# Altium PCB parsa_sanoni.PcbDoc
Units mm, origin at the board's own origin, x right, y up, seen from the top; angles counter-clockwise.
Board outline 102.11 x 63.25 mm, 2 copper layers (Top Layer, Bottom Layer); 29 components, 23 nets, 114 pads, 15 vias.
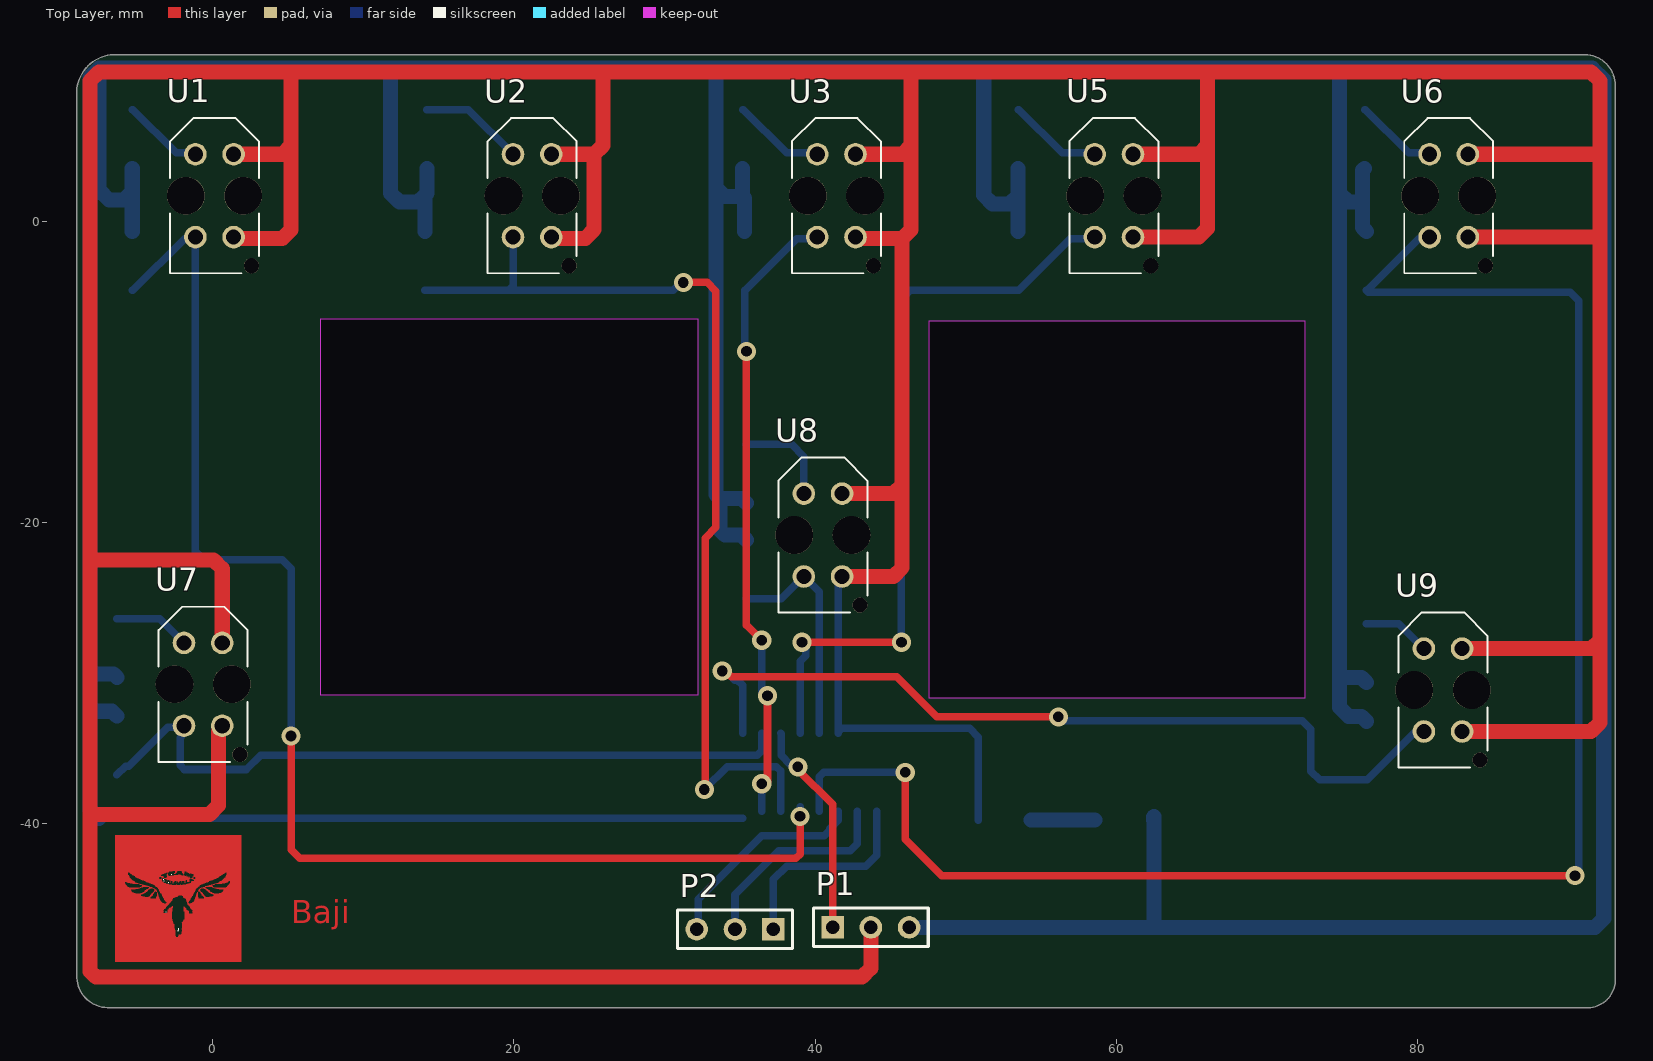
[diagram p0: Top Layer view]
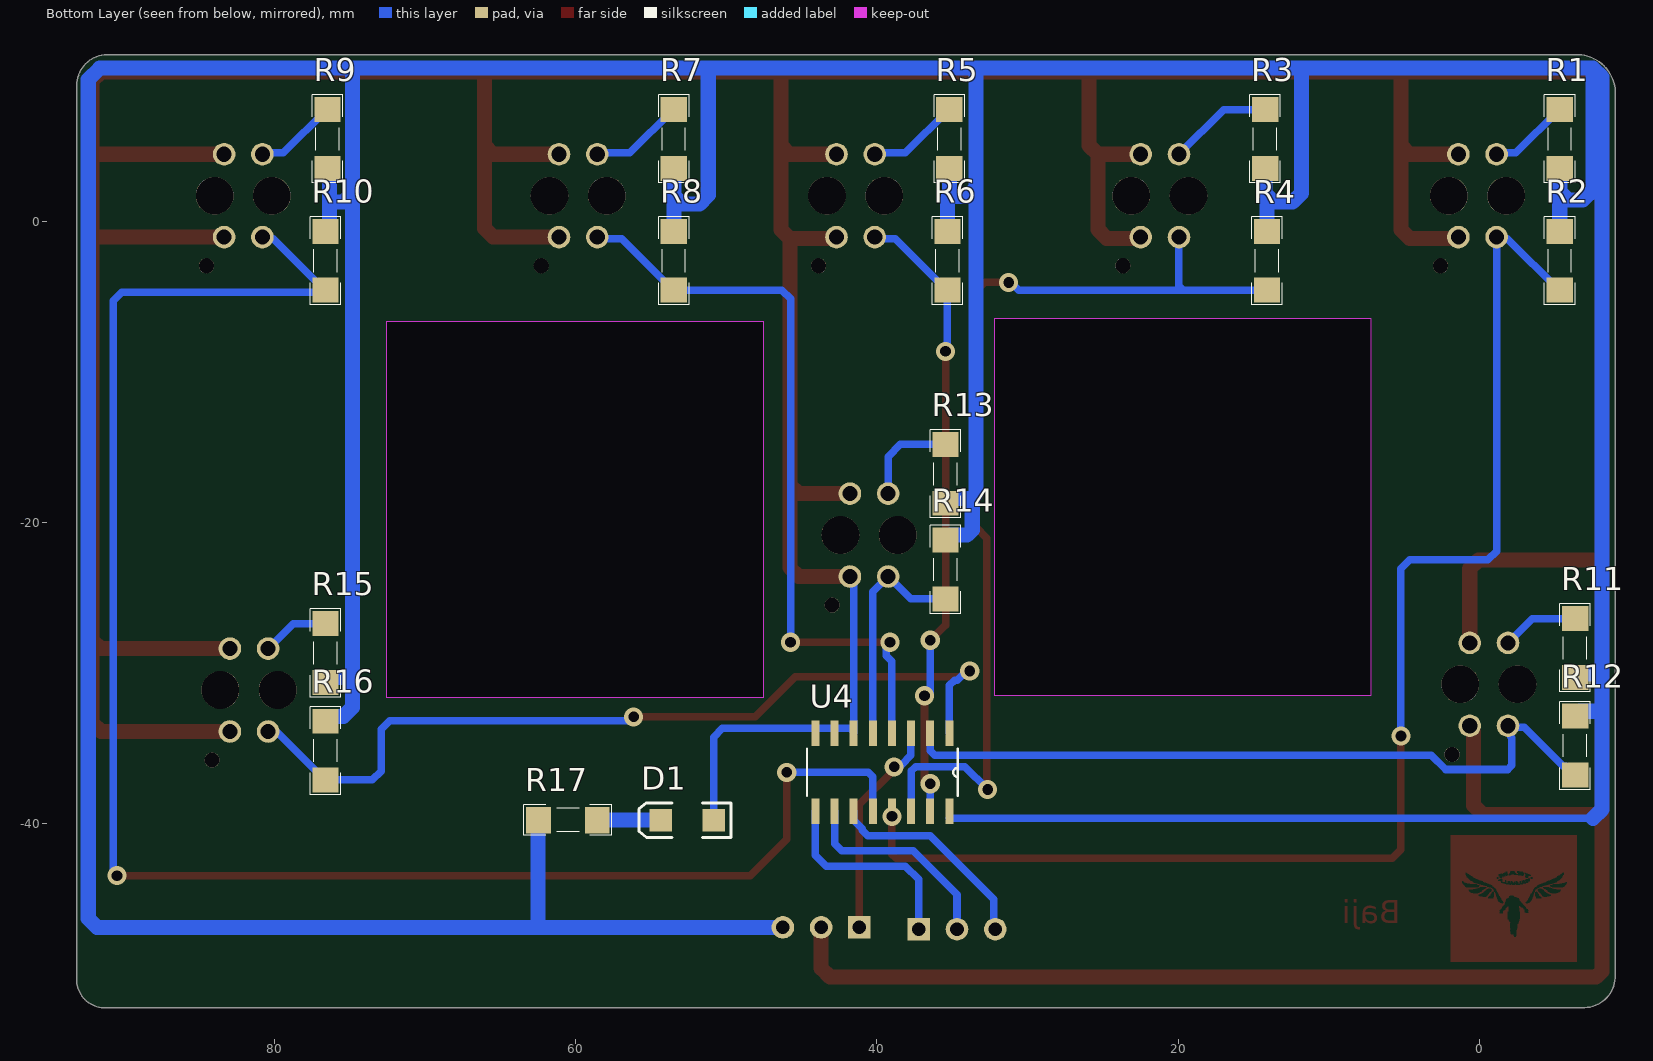
[diagram p1: Bottom Layer view, seen from below]
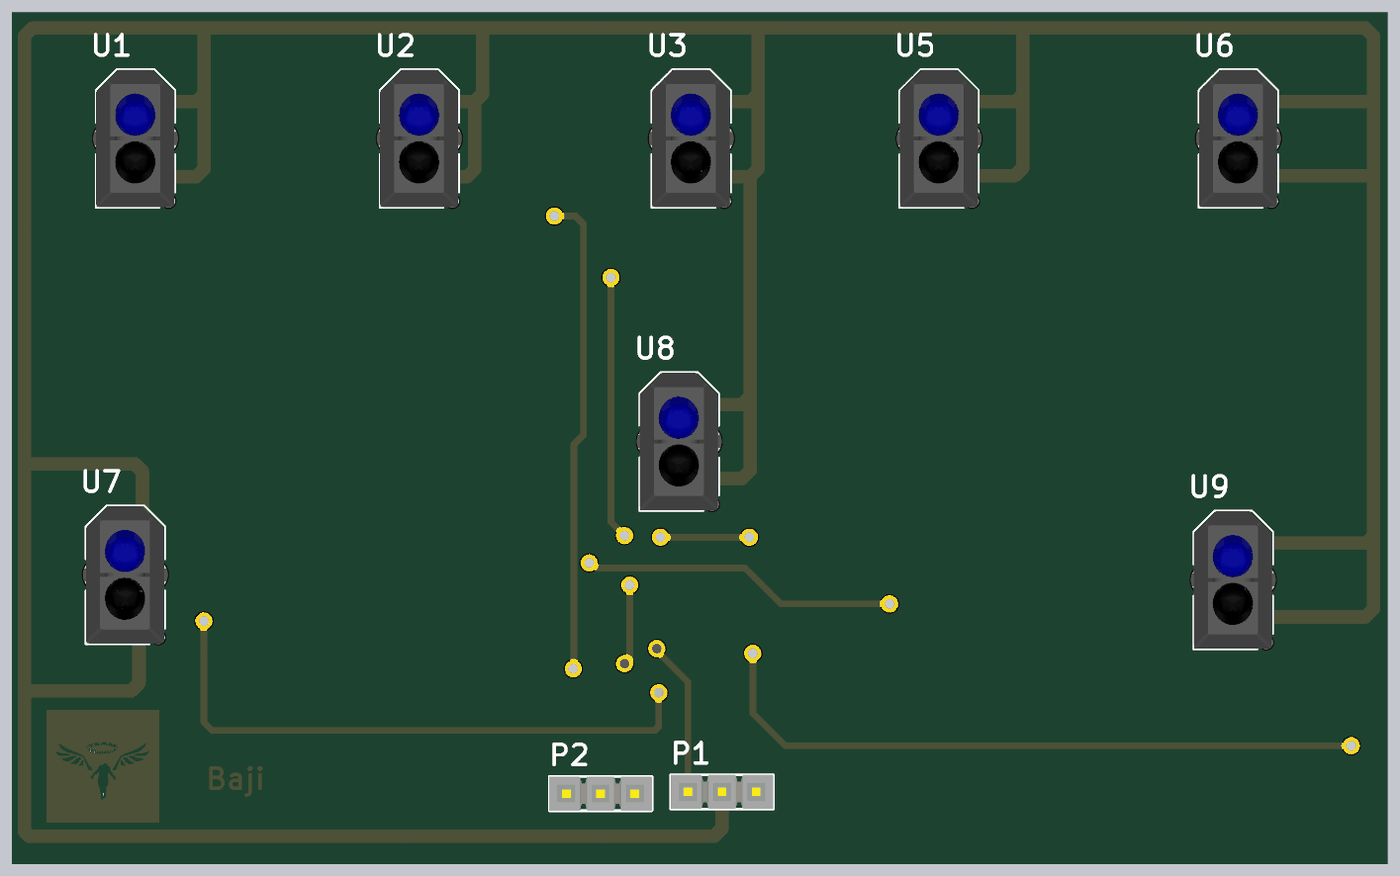
[diagram p2: 3D render of the assembled board from above, using the file's embedded part models]
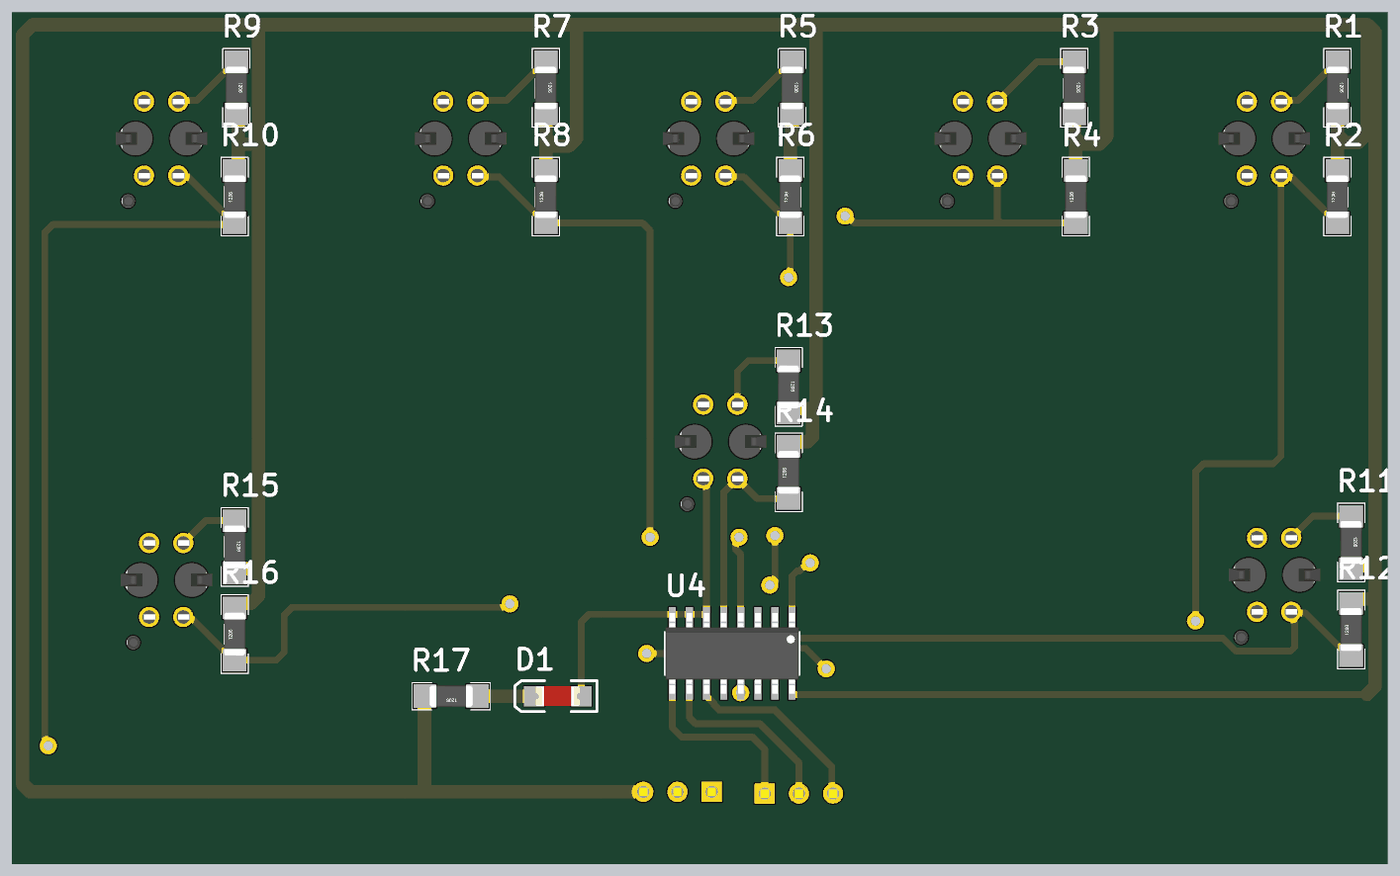
[diagram p3: 3D render of the assembled board from below, using the file's embedded part models]

## Layer stack, top to bottom
Top Solder: solder mask 0.0102, Solder Resist, Dk 3.5
Top Layer: signal copper 0.0356
Dielectric 1: dielectric 0.32, FR-4, Dk 4.8
Bottom Layer: signal copper 0.0356
Bottom Solder: solder mask 0.0102, Solder Resist, Dk 3.5

## Board outline
-6.989,-52.197 cw(c-6.921,-50.102) -9.017,-50.036 -9.017,8.379 cw(c-6.477,8.509) -6.347,11.049 90.928,11.049 cw(c91.059,9.017) 93.096,9.017 cw(c91.059,9.017) 93.091,8.886 93.091,-50.419 93.091,-50.424 cw(c91.249,-50.355) 91.318,-52.197 cw(c91.249,-50.355) 91.184,-52.197
cut-out: 32.185,-31.477 7.185,-31.477 7.185,-6.477 32.185,-6.477
cut-out: 47.517,-31.623 72.517,-31.623 72.517,-6.623 47.517,-6.623

## Design rules (kind name [scope] priority, off if disabled: settings)
Clearance [All] p1: gap=0.254 ignorepadtopadclearanceinfootprint=FALSE except(0: Arc-Hole Track-Hole SMDPad-Hole THPad-Hole Via-Hole Fill-Hole Poly-Hole Region-Hole Text-Hole)
PolygonConnect [All] p1: connectstyle=Relief reliefconductorwidth=0.254 reliefentries=4 polygonreliefangle="90 Angle" airgapwidth=0.254
RoutingVias [All] p1: holewidth=0.711 width=1.27 viastyle="Through Hole" minholewidth=0.711 minwidth=1.27 maxholewidth=0.711 maxwidth=1.27
SolderMaskExpansion [All] p1: expansion=0.102 istentingtop=FALSE
Width [All] p1: maxlimit=2 minlimit=0.5 preferedwidth=1 minimp=50.000000 maximp=50.000000 favimp=50.000000
30 further rules are at their usual default settings.

## Components (designator, comment, footprint, x,y, rotation, side; value= is the part's Value field where it differs from the comment)
D1 "SMD 1206 LED" "LED 1206" 52.578,-39.751 r0 bottom
P1 "Header 3" HDR1X3 41.148,-46.863 r0 top
P2 "Header 3" HDR1X3 37.211,-46.99 r180 top
R1 "1K" RESC4817X04N -5.334,5.461 r270 bottom
R2 "1K" RESC4817X04N -5.334,-2.622 r90 bottom
R3 "1K" RESC4817X04N 14.224,5.461 r270 bottom
R4 "1K" RESC4817X04N 14.097,-2.622 r90 bottom
R5 "1K" RESC4817X04N 35.179,5.461 r270 bottom
R6 "1K" RESC4817X04N 35.306,-2.622 r90 bottom
R7 "1K" RESC4817X04N 53.467,5.461 r270 bottom
R8 "1K" RESC4817X04N 53.467,-2.622 r90 bottom
R9 "1K" RESC4817X04N 76.454,5.461 r270 bottom
R10 "1K" RESC4817X04N 76.581,-2.622 r90 bottom
R11 "1K" RESC4817X04N -6.35,-28.321 r270 bottom
R12 "1K" RESC4817X04N -6.35,-34.798 r90 bottom
R13 "1K" RESC4817X04N 35.433,-16.764 r270 bottom
R14 "1K" RESC4817X04N 35.433,-23.114 r90 bottom
R15 "1K" RESC4817X04N 76.581,-28.657 r270 bottom
R16 "1K" RESC4817X04N 76.581,-35.134 r90 bottom
R17 "1K" RESC4817X04N 60.497,-39.751 r0 bottom
U1 "TCRT5000" OPTO_TCRT5000 0.127,1.695 r90 top
U2 "TCRT5000" OPTO_TCRT5000 21.209,1.695 r90 top
U3 "TCRT5000" OPTO_TCRT5000 41.402,1.695 r90 top
U4 "74HC4051D" SOIC127P600X175-16N 39.624,-36.576 r270 bottom
U5 "TCRT5000" OPTO_TCRT5000 59.817,1.695 r90 top
U6 "TCRT5000" OPTO_TCRT5000 82.042,1.695 r90 top
U7 "TCRT5000" OPTO_TCRT5000 -0.63,-30.734 r90 top
U8 "TCRT5000" OPTO_TCRT5000 40.508,-20.828 r90 top
U9 "TCRT5000" OPTO_TCRT5000 81.661,-31.115 r90 top

## Footprints (in the part's own frame and the unit in brackets; to place one, negate y for a bottom-side part, rotate by r counter-clockwise, add the part's x,y. Pads: shape width x height; smd on the part's side, far side on the other; paste and mask are expansions set on the pad)
HDR1X3 [mm] "Connector; Header; 3 Position"
  rect 1.5x1.5 hole 0.9: 1(0,0)
  round 1.5 hole 0.9: 2(2.54,0) 3(5.08,0)
  silkscreen extent -1.27,-1.27 6.35,1.27, body extent -1.26,-1.27 6.36,1.27, height 8.38
"LED 1206" [mm]
  rect 1.5x1.5 smd: 1(-1.75,0) 2(1.75,0)
  silkscreen extent -2.9,-1.15 3.2,1.15, body extent -1.65,-0.72 1.65,0.73, height 1.36
OPTO_TCRT5000 [mm]
  round 1.5 hole 1: A(2.75,1.27) CATH(2.75,-1.27) COLL(-2.75,1.27) E(-2.75,-1.27)
  round 1 hole 1 unplated: ""(-4.65,-2.45)
  round 2.5 hole 2.5 unplated: ""(0,1.9) ""(0,-1.9)
  silkscreen extent -5.15,-2.95 5.15,2.95, body extent -5.1,-3.37 5.1,3.43, height 7.2
RESC4817X04N [mm] "Chip Resistor, 2-Leads, Body 4/80x1/70mm, IPC Medium Density-Design:Abbas Basereh"
  rect 1.65x1.75 smd: 1(-1.95,0) 2(1.95,0)
  silkscreen extent -2.92,-1.02 2.92,1.02, body extent -1.6,-0.8 1.6,0.8, height 1
SOIC127P600X175-16N [mil]
  rect 67x21 smd: 1(-102,175) 2(-102,125) 3(-102,75) 4(-102,25) 5(-102,-25) 6(-102,-75) 7(-102,-125) 8(-102,-175) 9(102,-175) 10(102,-125) 11(102,-75) 12(102,-25) 13(102,25) 14(102,75) 15(102,125) 16(102,175)
  silkscreen extent -62,-197 62,197, body extent -118,-195 118,195, height 69

## Part data
D1: library part "LED SMD 1206"
P1 P2: "Header, 3-Pin", LatestRevisionDate=17-Jul-2002, LatestRevisionNote="Re-released for DXP Platform.", Publisher="Altium Limited"
R1 R2 R3 R4 R5 R6 R7 R8 R9 R10 R11 R12 R13 R14 R15 R16 R17: library part "RES 1206 0.25W", "RES 1206", Data=16-12-2016, Desc.="RES SMD 1206", Designer="Abbas Basereh"
U1 U2 U3 U5 U6 U7 U8 U9: "950 nm 60 mA Through Hole Reflective Optical Sensor with Transistor Output", Package=None, Availability=Unavailable, MP=TCRT5000, Price=None
U4: "1 Circuit IC Switch 8:1 130Ohm 16-SOIC", Package="SOIC-16 Toshiba", Availability="In Stock", Check_prices=https://www.snapeda.com/parts/74HC4051D/Toshiba/view-part/?ref=eda, MF=Toshiba, MP=74HC4051D, Price=None, Purchase-URL=https://pricing.snapeda.com/search/part/74HC4051D/?ref=eda, SnapEDA_Link=https://www.snapeda.com/parts/74HC4051D/Toshiba/view-part/?ref=snap

## Via types
v1: diameter 1.27, hole 0.711, Top Layer to Bottom Layer, 15 vias

## Nets (pads, with @x,y where several pads share a name; then routed paths per layer and width w, separated by ;. In a path a pad name is that pad's centre, name@x,y a point inside that pad or via, vN(x,y) a via of type N, cw(c..) or ccw(c..) an arc to the next point about the centre after c; other vN are vias at no path point)
+5: P1.3 R1.2 R2.2 R3.2 R4.2 R5.2 R6.2 R7.2 R8.2 R9.2 R10.2 R11.2 R12.2 R13.2 R14.2 R15.2 R16.2 R17.2 U4.16 | length 446
  Bottom Layer w0.5: -7.542,-39.624 U4.16@35.179,-39.624
  Bottom Layer w1: -7.542,-39.624 -8.128,-39.038 -8.128,-32.434 ; R12.2 -6.675,-32.523 -8.039,-32.523 -8.128,-32.434 ; R11.2 -6.572,-30.049 -8.128,-30.049 ; R2.2 -5.334,1.983 ; R1.2 -5.334,1.983 ; R4.2 14.097,1.729 ; R3.2 14.224,1.856 14.097,1.729 ; R5.2 35.179,1.651 ; R6.2 35.306,1.524 35.179,1.651 ; R14.2 35.108,-20.839 34.005,-20.839 33.662,-20.496 33.662,-18.389 ; R13.2 35.108,-18.389 33.662,-18.389 ; P1.3 62.738,-46.863 ; R8.2 53.467,1.729 ; R7.2 53.467,1.729 ; R17.2 62.447,-39.534 62.484,-39.497 62.484,-46.609 62.738,-46.863 ; R9.2 76.327,3.384 76.327,1.27 ; R16.2 76.256,-32.859 75.389,-32.859 74.803,-32.273 74.803,-30.275 ; R15.2 76.256,-30.282 74.81,-30.282 74.803,-30.275 ; R10.2 76.327,-0.418 76.327,1.27 ; -8.128,-32.434 -8.128,-30.049 ; -8.128,-30.049 -8.128,9.574 -7.542,10.16 ; -7.542,10.16 -7.542,2.081 -6.858,1.397 -5.92,1.397 -5.334,1.983 ; -7.542,10.16 11.811,10.16 ; 11.811,10.16 33.401,10.16 ; 11.811,10.16 11.811,1.856 12.397,1.27 13.638,1.27 14.097,1.729 ; 33.401,2.237 33.401,-18.128 33.662,-18.389 ; 33.401,2.237 33.401,10.16 ; 33.401,2.237 33.987,1.651 35.179,1.651 ; 33.401,10.16 51.181,10.16 ; 51.181,10.16 74.803,10.16 ; 51.181,10.16 51.181,1.729 51.767,1.143 52.881,1.143 53.467,1.729 ; 62.738,-46.863 91.743,-46.863 92.329,-46.277 92.329,9.398 91.567,10.16 74.803,10.16 ; 74.803,-30.275 74.803,1.856 ; 74.803,1.856 74.803,10.16 ; 74.803,1.856 75.389,1.27 76.327,1.27
A0: R2.1 U1.COLL U4.13 | length 88.8
  Top Layer w0.5: v1(5.207,-34.163) 5.207,-41.705 5.793,-42.291 38.696,-42.291 38.989,-41.998 v1@38.989,-39.884
  Bottom Layer w0.5: R2.1 -5.284,-4.572 -1.863,-1.151 -1.239,-1.151 U1.COLL@-1.191,-1.103 ; U1.COLL U1.COLL@-1.191,-1.103 ; v1(5.207,-34.163) 5.207,-23.065 4.621,-22.479 -0.557,-22.479 -1.143,-21.893 -1.143,-1.151 U1.COLL@-1.191,-1.103 ; v1(38.989,-39.497) U4.13 U4.13@38.989,-38.862
A1: R4.1 U2.COLL U4.14 | length 65.3
  Top Layer w0.5: v1(31.242,-4.064) 32.815,-4.064 33.401,-4.65 33.401,-20.318 32.689,-21.03 32.689,-37.665 v1(32.639,-37.715)
  Bottom Layer w0.5: R4.1 19.646,-4.572 ; U2.COLL 19.939,-4.279 19.646,-4.572 ; v1(31.242,-4.064) 31.072,-4.064 30.564,-4.572 19.646,-4.572 ; v1(32.639,-37.715) 34.159,-36.195 37.409,-36.195 37.702,-36.488 37.702,-39.15 U4.14
A2: R6.1 U3.COLL U4.15 | length 41.1
  Top Layer w0.5: v1(35.433,-8.636) 35.433,-26.797 v1(36.449,-27.813) ; v1@36.83,-37.211 v1(36.83,-31.496)
  Bottom Layer w0.5: v1@35.306,-8.636 R6.1 35.356,-4.572 38.777,-1.151 40.036,-1.151 U3.COLL ; U4.15 v1(36.449,-37.338) ; v1(36.449,-27.813) 36.449,-31.242 v1@36.576,-31.369
A3: R10.1 U4.12 U6.COLL | length 116.1
  Top Layer w0.5: v1(45.974,-36.576) 45.974,-41.021 48.387,-43.434 v1(90.424,-43.434)
  Bottom Layer w0.5: U4.12 40.276,-39.15 40.276,-36.869 40.569,-36.576 v1(45.974,-36.576) ; U6.COLL 80.676,-1.151 80.052,-1.151 76.631,-4.572 R10.1 76.708,-4.699 90.092,-4.699 90.678,-5.285 v1@90.678,-43.307
A4: R16.1 U4.1 U9.COLL | length 57.4
  Top Layer w0.5: v1(33.828,-29.845) 34.036,-29.845 34.417,-30.226 45.407,-30.226 48.074,-32.893 v1(56.134,-32.893)
  Bottom Layer w0.5: v1(33.828,-29.845) 34.036,-29.845 34.644,-30.453 34.825,-30.453 35.179,-30.806 U4.1 ; v1(56.134,-32.893) 56.388,-33.147 72.312,-33.147 72.898,-33.733 72.898,-36.498 73.484,-37.084 R16.1 76.631,-37.084 79.754,-33.961 80.295,-33.961 U9.COLL
A5: R14.1 U4.5 U8.COLL | length 15.3
  Bottom Layer w0.5: R14.1 37.752,-25.064 U8.COLL 40.259,-24.599 U4.5
A6: R12.1 U4.2 U7.COLL | length 48.8
  Bottom Layer w0.5: R12.1 -5.775,-36.173 -5.566,-36.173 -2.973,-33.58 U7.COLL@-1.996,-33.58 ; U7.COLL -2.091,-33.675 -2.091,-34.209 -2.159,-34.277 -2.159,-36.095 -1.866,-36.388 2.236,-36.388 3.183,-35.441 36.139,-35.441 36.432,-35.148 36.432,-34.002 U4.2
A7: R8.1 U4.4 U5.COLL | length 50
  Top Layer w0.5: v1(39.116,-27.94) v1(45.72,-27.94)
  Bottom Layer w0.5: U4.4 39.006,-33.968 39.006,-29.193 39.37,-28.829 39.37,-28.194 v1(39.116,-27.94) ; v1@45.593,-27.686 45.72,-27.559 45.72,-5.158 46.306,-4.572 R8.1 53.517,-4.572 56.938,-1.151 58.451,-1.151 U5.COLL
AO: P1.1 U4.3 | length 14.5
  Top Layer w0.5: v1(38.841,-36.212) 38.841,-36.394 41.148,-38.701 P1.1
  Bottom Layer w0.5: U4.3 37.736,-34.002 37.736,-35.45 38.351,-36.065 38.694,-36.065 v1(38.841,-36.212)
GND: D1.1 P1.2 U1.CATH U1.E U2.CATH U2.E U3.CATH U3.E U4.6 U4.7 U4.8 U5.CATH U5.E U6.CATH U6.E U7.CATH U7.E U8.CATH U8.E U9.CATH U9.E | length 452.5
  Top Layer w1: U7.E 0.64,-33.619 0.381,-33.878 0.381,-38.784 -0.205,-39.37 -8.128,-39.37 ; U7.CATH@0.723,-28.067 U7.CATH 0.64,-23.065 0.054,-22.479 -8.128,-22.479 ; U1.E 1.493,-1.151 4.621,-1.151 5.207,-0.565 5.207,5.031 ; U1.CATH 4.621,4.445 5.207,5.031 ; U2.E 22.567,-1.143 24.736,-1.143 25.322,-0.557 25.322,4.445 ; U2.CATH 25.322,4.445 ; U8.E 45.183,-23.578 45.769,-22.992 45.769,-17.492 ; U8.CATH 45.183,-18.078 45.769,-17.492 ; U3.E 42.768,-1.151 45.769,-1.151 ; U3.CATH 45.769,4.445 46.355,5.031 ; P1.2 43.561,-46.99 43.584,-46.99 43.688,-47.094 43.688,-49.579 43.102,-50.165 -7.747,-50.165 -8.128,-49.784 -8.128,-39.37 ; U5.E 65.454,-1.055 66.04,-0.469 66.04,5.031 ; U5.CATH 65.454,4.445 66.04,5.031 ; U9.E 91.489,-33.865 92.075,-33.279 92.075,-27.813 ; U9.CATH 91.523,-28.365 92.075,-27.813 ; U6.E 91.987,-1.055 92.075,-1.143 ; U6.CATH 91.821,4.445 92.075,4.699 ; -8.128,-39.37 -8.128,-22.479 ; -8.128,-22.479 -8.128,9.32 -7.542,9.906 5.207,9.906 ; 5.207,5.031 5.207,9.906 ; 5.207,9.906 25.908,9.906 ; 25.322,4.445 25.908,5.031 25.908,9.906 ; 25.908,9.906 46.355,9.906 ; 45.769,-17.492 45.769,-1.151 ; 45.769,-1.151 46.355,-0.565 46.355,5.031 ; 46.355,5.031 46.355,9.906 ; 46.355,9.906 66.04,9.906 ; 66.04,5.031 66.04,9.906 ; 66.04,9.906 91.489,9.906 92.075,9.32 92.075,4.699 ; 92.075,-27.813 92.075,-1.143 ; 92.075,-1.143 92.075,4.699
  Bottom Layer w0.5: U4.6 U4.6@41.529,-33.888 ; U8.E 41.778,-23.713 41.529,-23.962 U4.6@41.529,-33.888 ; D1.1 50.828,-34.241 50.242,-33.655 41.762,-33.655 U4.6@41.529,-33.888
NetD1_2: D1.2 R17.1 | length 4.2
  Bottom Layer w1: D1.2 R17.1
NetR1_1: R1.1 U1.A | length 5.4
  Bottom Layer w0.5: R1.1 -5.284,7.411 -2.414,4.541 -1.239,4.541 U1.A
NetR3_1: R3.1 U2.A | length 6.9
  Bottom Layer w0.5: R3.1 16.973,7.411 U2.A
NetR5_1: R5.1 U3.A | length 6.2
  Bottom Layer w0.5: R5.1 35.229,7.411 38.099,4.541 40.036,4.541 U3.A
NetR7_1: R7.1 U5.A | length 6.3
  Bottom Layer w0.5: R7.1 53.517,7.411 56.387,4.541 58.451,4.541 U5.A
NetR9_1: R9.1 U6.A | length 5.5
  Bottom Layer w0.5: R9.1 76.504,7.411 79.374,4.541 80.676,4.541 U6.A
NetR11_1: R11.1 U7.A | length 5.1
  Bottom Layer w0.5: R11.1 -3.513,-26.371 U7.A
NetR13_1: R13.1 U8.A | length 6.7
  Bottom Layer w0.5: R13.1 38.436,-14.814 39.238,-15.616 U8.A
  Bottom Layer w1: U8.A@39.142,-17.982 U8.A
NetR15_1: R15.1 U9.A | length 4.5
  Bottom Layer w0.5: R15.1 78.733,-26.707 U9.A
P1: P2.3 U4.11 | length 14.2
  Bottom Layer w0.5: P2.3 32.227,-46.894 32.227,-44.989 36.444,-40.772 40.602,-40.772 40.956,-40.418 40.956,-40.324 41.512,-39.768 41.512,-39.184 U4.11
P2: P2.2 U4.10 | length 14
  Bottom Layer w0.5: P2.2 34.671,-44.704 37.58,-41.795 42.328,-41.795 42.799,-41.324 U4.10
P3: P2.1 U4.9 | length 13.7
  Bottom Layer w0.5: P2.1 37.211,-43.688 38.1,-42.799 43.356,-42.799 44.069,-42.086 U4.9
pads on no net: U1. U2. U3. U5. U6. U7. U8. U9.

## Other copper
Top Layer:
  region: 5 vertices and 24 holes, not listed, extent -6.477,-49.149 1.905,-40.767
  text "Baji" at 5.207,-46.609 h1.52

## Silkscreen, mask and mechanical layers (free items; w line width, h text height)
Top Overlay:
  region: -2.714,-43.337 -2.714,-43.375 -2.752,-43.375 -2.752,-43.337
  region: -2.938,-43.896 -2.938,-43.859 -2.901,-43.859 -2.901,-43.896
  region: -3.199,-43.822 -3.236,-43.822 -3.236,-43.785 -3.199,-43.785
  region: -3.236,-43.71 -3.273,-43.71 -3.273,-43.673 -3.236,-43.673
  region: -3.124,-45.871 -3.124,-45.833 -3.087,-45.833 -3.087,-45.871
  region: -2.267,-47.026 -2.267,-46.914 -2.23,-46.914 -2.23,-47.063 -2.267,-47.063 -2.267,-47.137 -2.305,-47.137 -2.305,-47.063 -2.267,-47.063
Mechanical 1:
  lines w0.254: -8.89,-50.165 -8.89,8.382 cw(c-6.477,8.509) -6.35,10.922 90.932,10.922 cw(c91.059,9.017) 92.964,8.89 92.964,-50.419 cw(c91.249,-50.355) 91.186,-52.07 ; -8.89,-50.038 ccw(c-6.921,-50.102) -6.985,-52.07 91.313,-52.07 ; 7.239,-31.571 32.239,-31.571 32.239,-6.571 7.239,-6.571 7.239,-31.571 ; 47.517,-31.623 47.517,-6.623 72.517,-6.623 72.517,-31.623 47.517,-31.623